# Altium PCB PCB_Final.PcbDoc
Units mil, origin at the board's own origin, x right, y up, seen from the top; angles counter-clockwise.
Board outline 700 x 825 mil, 2 copper layers (Top Layer, Bottom Layer); 49 components, 49 nets, 136 pads, 11 vias.
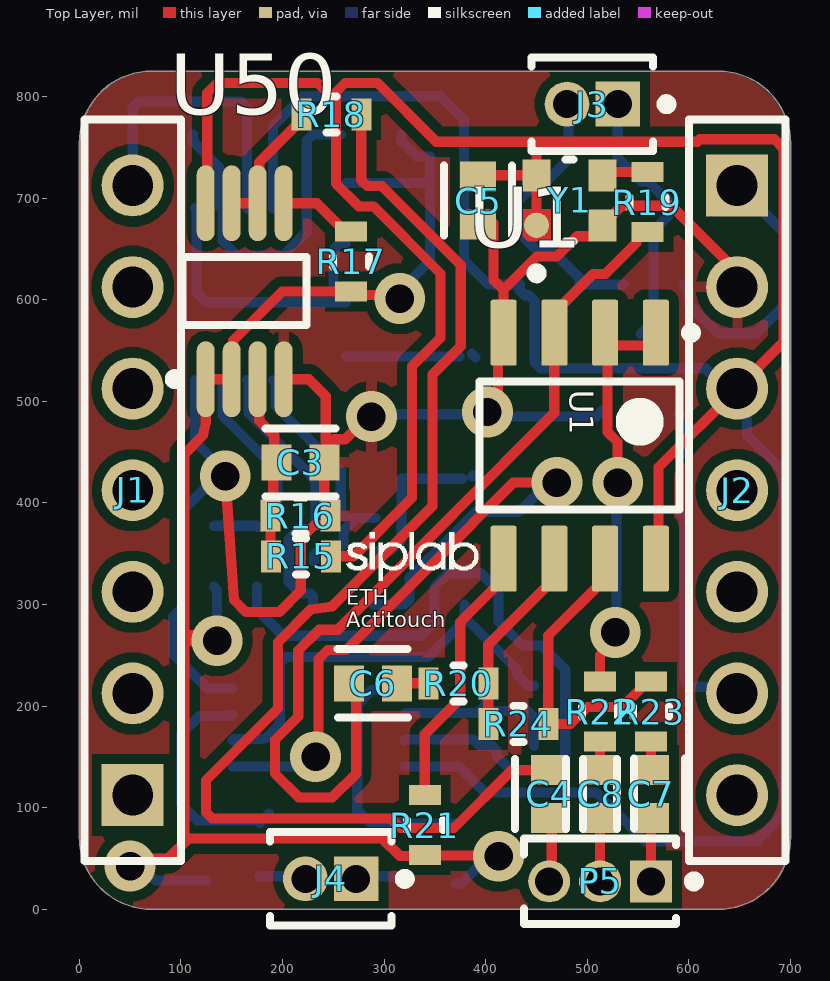
[diagram p0: Top Layer view]
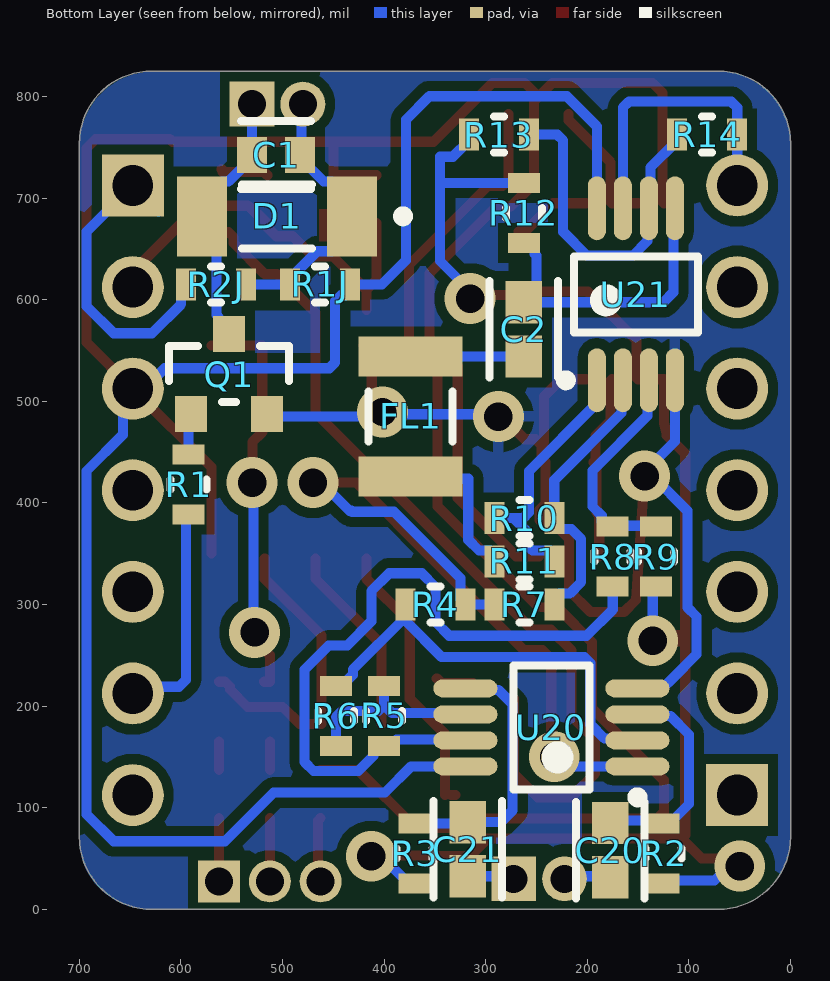
[diagram p1: Bottom Layer view, seen from below]
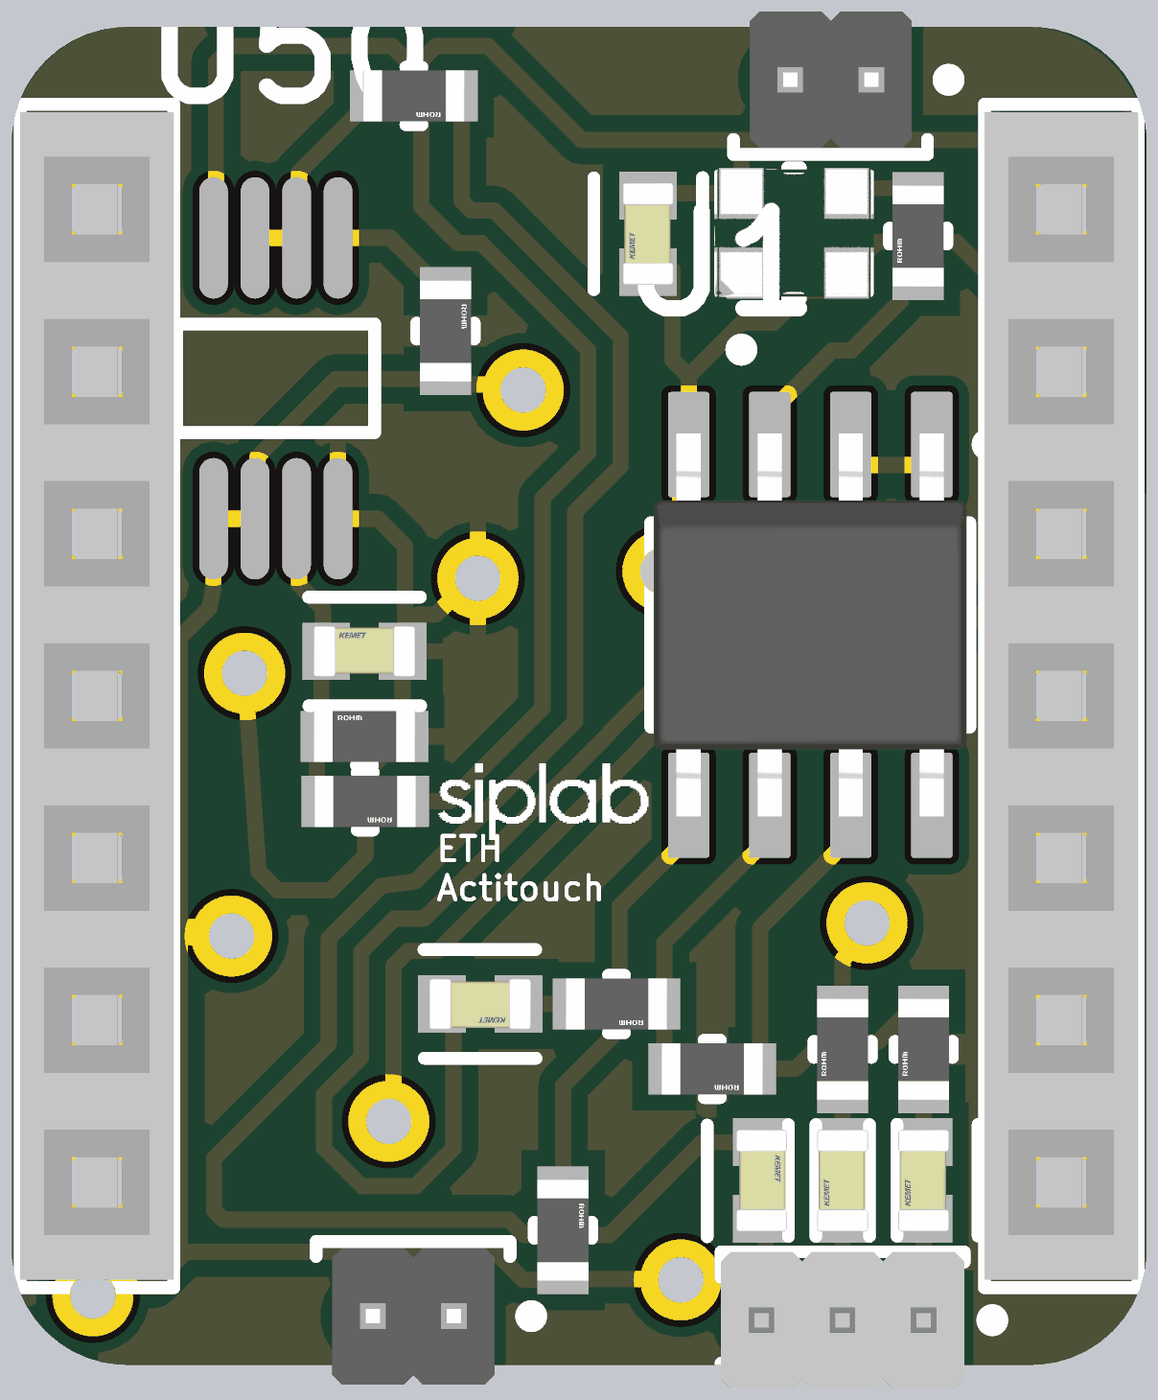
[diagram p2: 3D render of the assembled board from above, using the file's embedded part models]
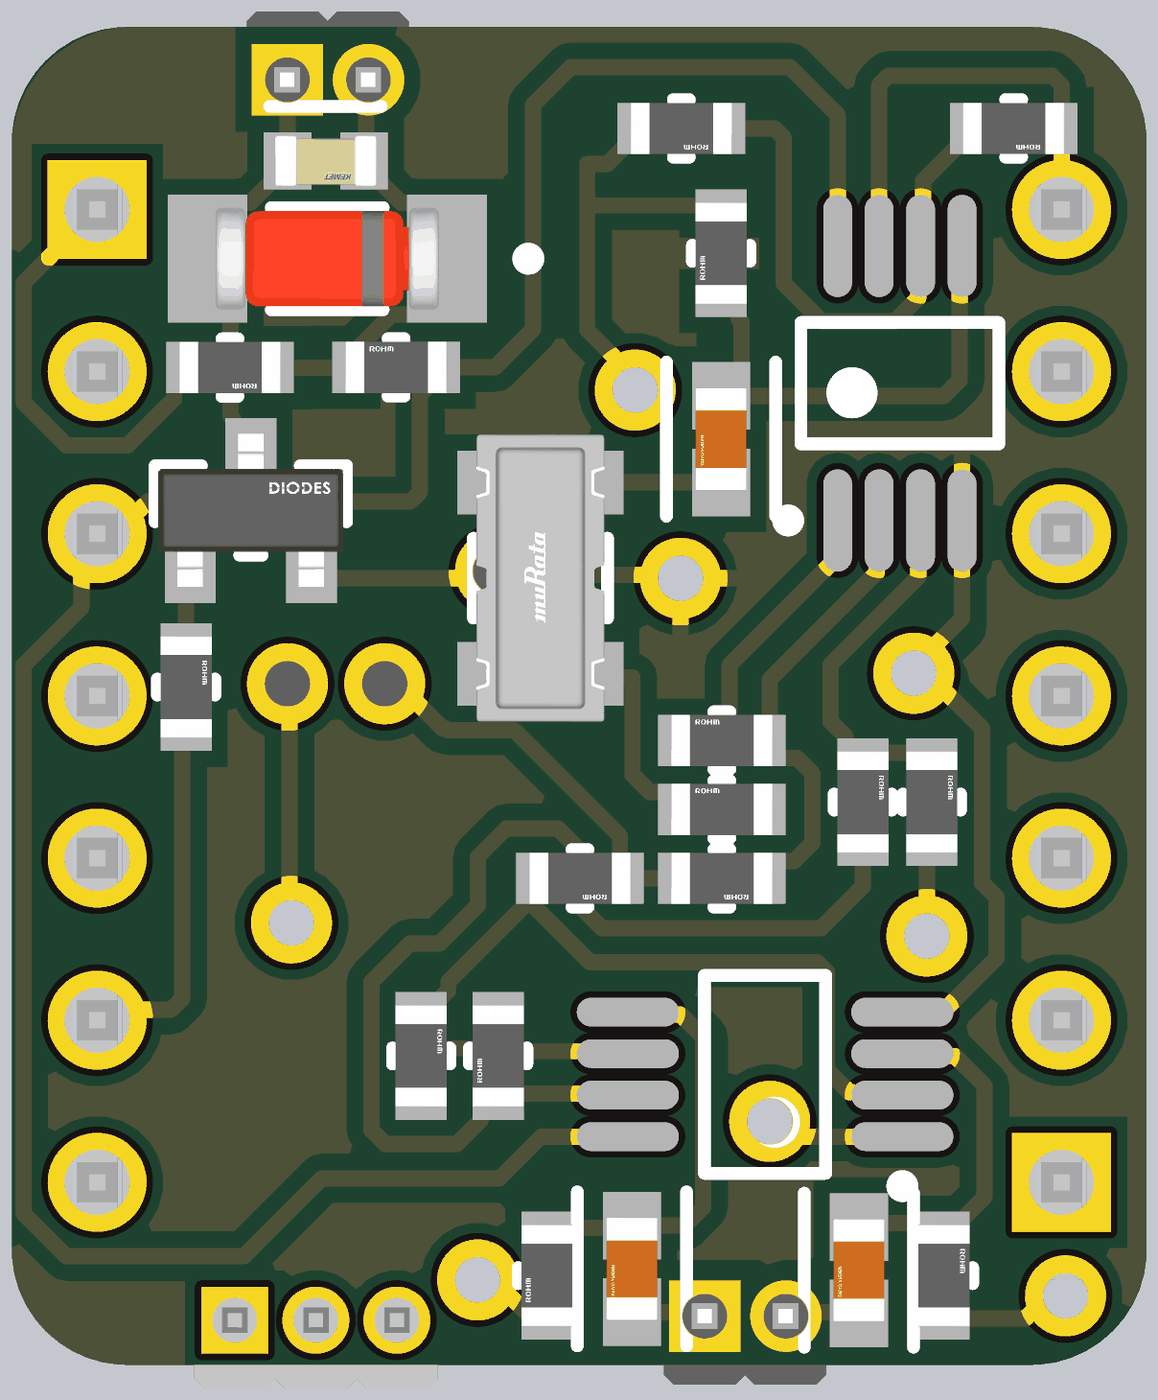
[diagram p3: 3D render of the assembled board from below, using the file's embedded part models]

## Layer stack, top to bottom
Top Solder: solder mask 0.4, Solder Resist, Dk 3.5
Top Layer: signal copper 1.4
Dielectric 1: dielectric 12.6, FR-4, Dk 4.8
Bottom Layer: signal copper 1.4
Bottom Solder: solder mask 0.4, Solder Resist, Dk 3.5

## Board outline
71.21,0 cw(c71.21,71.21) 0,71.21 0,753.79 cw(c71.21,753.79) 71.21,825 628.79,825 cw(c628.79,753.79) 700,753.79 700,71.21 cw(c628.79,71.21) 628.79,0

## Design rules (kind name [scope] priority, off if disabled: settings)
Clearance [All] p1: gap=10 ignorepadtopadclearanceinfootprint=FALSE except(0: Arc-Hole Track-Hole SMDPad-Hole THPad-Hole Via-Hole Fill-Hole Poly-Hole Region-Hole Text-Hole)
PolygonConnect [All] p1: connectstyle=Relief reliefconductorwidth=10 reliefentries=4 polygonreliefangle="90 Angle" airgapwidth=10
RoutingVias [All] p1: holewidth=28 width=50 viastyle="Through Hole" minholewidth=28 minwidth=50 maxholewidth=28 maxwidth=50
SolderMaskExpansion [All] p1: expansion=4 istentingtop=FALSE
Width [All] p1: maxlimit=10 minlimit=10 preferedwidth=10
30 further rules are at their usual default settings.

## Classes and differential pairs
component class U_VibrationMotor: C1 D1 Q1 R1 R1J R2J
component class U_ActiTouch_Transmitter_Sheet1: C5 C6 C7 C8 R19 R20 R21 R22 R23 R24 U1 Y1
component class U_ActiTouch_Shield_Sheet1: C3 C4 R15 R16 R17 R18 U50
component class U_ActiTouch_Receiver_Sheet1: C2 C20 C21 FL1 R2 R3 R4 R5 R6 R7 R8 R9 R10 R11 R12 R13 R14 U20 U21
component class ActiTouch: J1 J2 J3 J4 P5

## Components (designator, comment, footprint, x,y, rotation, side; value= is the part's Value field where it differs from the comment)
C1 "C0603C104K5RACTU" FP-C0603C-CF-MFG 506.38,742.5 r0 bottom value="0.10 μF"
C2 "EMK107B7104KAHT" FP-0603-L_1_6_0_1-W_0_8_0-IPC_B 262.5,570.84 r90 bottom
C3 "C0603C104K5RACTU" FP-C0603C-CF-MFG 217.5,440 r0 top value="0.10 μF"
C4 "C0603C104K5RACTU" FP-C0603C-CF-MFG 462.5,113.62 r270 top value="0.10 μF"
C5 "C0603C104K5RACTU" FP-C0603C-CF-MFG 392.5,697.5 r90 top value="0.10 μF"
C6 "C0603C104K5RACTU" FP-C0603C-CF-MFG 288.88,222.5 r180 top value="0.10 μF"
C7 "C0603C104K5RACTU" FP-C0603C-CF-MFG 562.5,113.62 r90 top value="0.10 μF"
C8 "C0603C104K5RACTU" FP-C0603C-CF-MFG 512.5,113.62 r90 top value="0.10 μF"
C20 "EMK107B7104KAHT" FP-0603-L_1_6_0_1-W_0_8_0-IPC_B 177.5,58.34 r90 bottom
C21 "EMK107B7104KAHT" FP-0603-L_1_6_0_1-W_0_8_0-IPC_B 317.5,59.16 r90 bottom
D1 "LS4448GS08" FP-6_560-5006_01-4-MFG 505.44,682.14 r0 bottom value=4pF
FL1 "CDSCB10M7GA121-R0" FP-CDSCB10M7GA121-R0-MFG 373.93,485.12 r90 bottom
J1 "SSQ-107-01-G-S" SMTC-SSQ-107-01-X-S 52.5,112.5 r90 top locked
J2 "SSQ-107-01-G-S" SMTC-SSQ-107-01-X-S 647.4,712.5 r270 top locked
J3 "GRPB021VWVN-RC" FP-GRPB021VWVN-RC-MFG 505,792.5 r180 top
J4 "GRPB021VWVN-RC" FP-GRPB021VWVN-RC-MFG 247.5,30 r180 top
P5 "GRPB031VWVN-RC" SLIN-GRPB031VWVN-RC_V 512.5,27.5 r180 top
Q1 "DMG2302UK-7" FP-SOT23-MFG 552.6,526.87 r90 bottom
R1 "ESR03EZPJ101" FP-ESR03-MFG 592.5,417.97 r270 bottom
R1J "ESR03EZPJ101" FP-ESR03-MFG 462.97,615.12 r180 bottom
R2 "ESR03EZPJ101" FP-ESR03-MFG 125,55 r270 bottom
R2J "ESR03EZPJ101" FP-ESR03-MFG 565.47,615 r0 bottom
R3 "ESR03EZPJ101" FP-ESR03-MFG 370,55 r90 bottom
R4 "ESR03EZPJ101" FP-ESR03-MFG 349.53,300 r0 bottom
R5 "ESR03EZPJ101" FP-ESR03-MFG 400,190.47 r90 bottom
R6 "ESR03EZPJ101" FP-ESR03-MFG 447.5,190.47 r270 bottom
R7 "ESR03EZPJ101" FP-ESR03-MFG 262.03,300 r0 bottom
R8 "ESR03EZPJ101" FP-ESR03-MFG 175,347.03 r270 bottom
R9 "ESR03EZPJ101" FP-ESR03-MFG 132.5,347.03 r270 bottom
R10 "ESR03EZPJ101" FP-ESR03-MFG 262.03,385 r180 bottom
R11 "ESR03EZPJ101" FP-ESR03-MFG 262.03,342.5 r180 bottom
R12 "ESR03EZPJ101" FP-ESR03-MFG 262.5,685.47 r90 bottom
R13 "ESR03EZPJ101" FP-ESR03-MFG 287.03,762.5 r0 bottom
R14 "ESR03EZPJ101" FP-ESR03-MFG 82.03,762.5 r0 bottom
R15 "ESR03EZPJ101" FP-ESR03-MFG 217.97,347.5 r180 top
R16 "ESR03EZPJ101" FP-ESR03-MFG 217.5,387.5 r0 top
R17 "ESR03EZPJ101" FP-ESR03-MFG 267.5,637.5 r270 top
R18 "ESR03EZPJ101" FP-ESR03-MFG 247.97,782.5 r180 top
R19 "ESR03EZPJ101" FP-ESR03-MFG 559.09,696.08 r90 top
R20 "ESR03EZPJ101" FP-ESR03-MFG 372.97,222.5 r180 top
R21 "ESR03EZPJ101" FP-ESR03-MFG 340,82.97 r270 top
R22 "ESR03EZPJ101" FP-ESR03-MFG 512.5,194.53 r90 top
R23 "ESR03EZPJ101" FP-ESR03-MFG 562.5,194.53 r90 top
R24 "ESR03EZPJ101" FP-ESR03-MFG 432.03,182.5 r180 top
U1 "OPA2836IDR" D0008A_M 492.5,456.28 r270 top
U20 "LTC6253IMS8#TRPBF" LT-MS8-8_N 235.35,179.11 r0 bottom
U21 "LTC6253IMS8#TRPBF" LT-MS8-8_N 152.2,605.35 r90 bottom
U50 "LTC6253IMS8#TRPBF" LT-MS8-8_M 162.8,608.39 r90 top
Y1 "DSC6003MI2A-010.7000T" FP-C04-1202-MFG 482.48,697.89 r0 top

## Footprints (in the part's own frame and the unit in brackets; to place one, negate y for a bottom-side part, rotate by r counter-clockwise, add the part's x,y. Pads: shape width x height; smd on the part's side, far side on the other; paste and mask are expansions set on the pad)
D0008A_M [mm] "SOIC, 8-Leads, Body 5x4mm, Pitch 1.27mm, IPC Low Density"
  rrect15% 1.65x0.65 smd: 1(-2.825,1.905) 2(-2.825,0.635) 3(-2.825,-0.635) 4(-2.825,-1.905) 5(2.825,-1.905) 6(2.825,-0.635) 7(2.825,0.635) 8(2.825,1.905)
  silkscreen extent -2.95,-2.5 1.6,2.91, body extent -3,-2.45 3,2.45, height 1.63
FP-6_560-5006_01-4-MFG [mm]
  rect 1.25x2 smd paste+0 mask+0: 1(-1.875,0) 2(1.875,0)
  silkscreen extent -3.27,-0.8 0.87,0.8, body extent -1.75,-0.8 1.75,0.8, height 1.6
FP-0603-L_1_6_0_1-W_0_8_0-IPC_B [mil]
  rect 41.64x35.91 smd paste+0 mask+0: 1(-26.66,0) 2(26.66,0)
  silkscreen extent -47,-34 47,34, body extent -31,-16 31,16, height 35
FP-C04-1202-MFG [mm]
  round 0.63 smd paste+0 mask+0: 1(-0.825,-0.625)
  rect 0.7x0.8 smd paste+0 mask+0: 2(0.825,-0.625) 3(0.825,0.625) 4(-0.825,0.625)
  Top Layer region: -1.175,-0.225 -0.475,-0.225 -0.475,-1.025 -1.045,-1.025 -1.175,-0.895
  silkscreen extent -0.95,-1.95 0.1,1.02, body extent -1.78,-1.53 1.78,1.53, height 0.25
FP-C0603C-CF-MFG [mm]
  rect 0.75x0.9 smd paste+0 mask+0: 1(-0.6,0) 2(0.6,0)
  silkscreen extent -0.87,-0.85 0.88,0.85, body extent -0.8,-0.4 0.8,0.4, height 0.87
FP-CDSCB10M7GA121-R0-MFG [mm]
  rect 1x2.6 smd paste+0 mask+0: 1(-1.5,0) 2(1.5,0)
  silkscreen extent -0.63,-1.05 0.63,1.05, body extent -2.25,-1 2.25,1, height 1
FP-ESR03-MFG [mm]
  rect 0.5x0.8 smd paste+0 mask+0: 1(-0.75,0) 2(0.75,0)
  silkscreen extent -0.13,-0.45 0.13,0.45, body extent -0.8,-0.4 0.8,0.4, height 0.55
FP-GRPB021VWVN-RC-MFG [mm]
  rect 1.12x1.12 hole 0.7 paste-1000 mask+0: 1(-0.635,0)
  round 1.12 hole 0.7 paste-1000 mask+0: 2(0.635,0)
  silkscreen extent -1.97,-1.17 1.52,1.17, body extent -1.62,-1.27 1.62,1.27, height 0.25
FP-SOT23-MFG [mm]
  rect 0.9x0.8 smd paste+0 mask+0: 1(-1,0.95) 2(-1,-0.95) 3(1,0)
  silkscreen extent -0.7,-1.5 0.7,1.5, body extent -1.2,-1.45 1.2,1.45, height 1.1
LT-MS8-8_M [mm] "SOP, 8-Leads, Body 3x3mm, Pitch 0.65mm, IPC Low Density"
  oval 1.9x0.45 smd: 1(-2.2,0.975) 2(-2.2,0.325) 3(-2.2,-0.325) 4(-2.2,-0.975) 5(2.2,-0.975) 6(2.2,-0.325) 7(2.2,0.325) 8(2.2,0.975)
  silkscreen extent -2.32,-1.55 0.85,1.87, body extent -1.55,-1.55 1.55,1.55, height 1.1
LT-MS8-8_N [mm] "SOP, 8-Leads, Body 3x3mm, Pitch 0.65mm, IPC Medium Density"
  oval 1.6x0.45 smd: 1(-2.15,0.975) 2(-2.15,0.325) 3(-2.15,-0.325) 4(-2.15,-0.975) 5(2.15,-0.975) 6(2.15,-0.325) 7(2.15,0.325) 8(2.15,0.975)
  silkscreen extent -2.27,-1.55 0.95,1.87, body extent -1.55,-1.55 1.55,1.55, height 1.1
SLIN-GRPB031VWVN-RC_V [mm] "Header, 3-Leads, Body 3.81x2.14mm, Pitch 1.27mm"
  rect 1.05x1.05 hole 0.7: 1(-1.27,0)
  round 1.05 hole 0.7: 2(0,0) 3(1.27,0)
  silkscreen extent -2.47,-1.07 1.91,1.07, body extent -1.9,-1.07 1.91,1.07, height 4
SMTC-SSQ-107-01-X-S [mm] "SQ Post Socket, 1x7 Pins, Vertical, 2.54mm Pitch, Female"
  rect 1.55x1.55 hole 1.02: 1(0,0)
  round 1.55 hole 1.02: 2(2.54,0) 3(5.08,0) 4(7.62,0) 5(10.16,0) 6(12.7,0) 7(15.24,0)
  silkscreen extent -1.65,-1.2 16.89,1.2, body extent -1.52,-1.21 16.76,1.21, height 8.51

## Part data
C1 C3 C4 C5 C6 C7 C8: library part CMP-2006-03061-2, "CAP CER 0.1UF 50V X7R 0603", Capacitance="0.10 μF", Manufacturer=KEMET, Package=C0603C-CF, Temperature="-55°C to +125°C", Temperature Characteristic=X7R, Temperature Coefficient=30ppm/°C, Temperature Range High=+125°C, Temperature Range Low=-55°C, Tolerance=0.1, Voltage Rating="50 V", Automotive=Yes, Automotive Grade="Grade 1", Category=Cap, ComponentLink2Description=Datasheet, ComponentLink2URL=https://api.kemet.com/component-edge/download/datasheet/C0603C100J5GACAUTO.pdf, Device Class L1="Passive Components", Device Class L2=Capacitors, Device Class L3="Ceramic Capacitors", Digikey Description="CAP CER 0.1UF 50V X7R 0603", Height=0.87mm, Lead Free=Yes, Manufacturer Part Number=C0603C104K5RACTU, Material=Ceramic, Octopart=https://octopart.com/c0603c104k5ractu-kemet-139244, RoHS=TRUE
C2 C20 C21: library part CMP-14477-003798-2, "None", Capacitance=100nF, Case/Package=0603, Package Quantity=4000, Tolerance=10%, Voltage Rating=16V, Halogen Free="Halogen Free", Lead Free="Lead Free", Packaging="Tape and Reel", Voltage Rating (DC)=16V
D1: library part CMP-02540-000047-1, "DIODE GEN PURP 100V 300MA SOD80", Capacitance=4pF, Forward Current=300mA, Manufacturer=Vishay, Max Junction Temp=+175°C, Max Repetitive Reverse Voltage=100V, Max Surge Forward Current=2A, Package=6.560-5006.01-4, Peak Reverse Current=5uA, Reverse Voltage=75V, Temperature="to +175°C", Automotive=Yes, Automotive Grade="Grade 0", Category=Diode, ComponentLink2Description=Datasheet, ComponentLink2URL=http://www.vishay.com/docs/85561/ls4148.pdf, Device Class L1="Discrete Semiconductors", Device Class L2=Diodes, Device Class L3="Rectifier Diodes", Digikey Description="DIODE GEN PURP 100V 300MA SOD80", Height=1.6mm, Lead Free=Yes, Manufacturer Part Number=LS4448GS08, Mouser Description="Diodes - General Purpose, Power, Switching 100V Io/150mA 2.0 Amp IFSM", Octopart=https://octopart.com/ls4448gs08-vishay-55433966, RoHS=TRUE, Temperature Range High=+175°C
FL1: library part CMP-06047-000004-1, "Ceramic Filter 10.7MHz 2-Pin Surface Mount Emboss T/R"
J1 J2: library part CMP-1023-00284-1, "SQ Post Socket, Through-hole, Vertical, -55 to 125 degC, 2.54 mm Pitch, 7-Pin, Female, RoHS", Manufacturer=Samtec, Temperature Range="-55 to 125 degC", ComponentLink1Description="Manufacturer URL", ComponentLink1URL=http://www.samtec.com, ComponentLink2Description=Datasheet, ComponentLink2URL=http://www.samtec.com/documents/webfiles/pdf/SSQ_TH.PDF, ComponentLink3Description="Package Specification", ComponentLink3URL=http://www.samtec.com/documents/webfiles/cpdf/SSQ-1XX-XX-XXX-X-XX-XXX-XX-X-MKT.pdf, DatasheetVersion=F-214, Mounting Technology=Through-hole, Orientation=Vertical, PackageDescription="Assembly, Socket Strip .025[0.64] SQ Tail", PackageReference=SSQ-107-01-X-S, PackageVersion="BD, 6/1987", PartNumber=SSQ-107-01-G-S, Pitch="2.54 mm", RoHS=True
J3 J4: library part CMP-2000-06371-2, "CONN HEADER VERT 2POS 1.27MM", Package Quantity=1, Connector Type="Male Pin", Contact Mating Length=0.118inch, Contact Plating=Gold, Contact Type="Male Pin", Lead Free="Lead Free", Mount="Through Hole", Number of Positions=2, Number of Rows=1, Packaging=Bulk, Pitch=0.05inch, RoHS Compliant=Yes, Termination=Solder
P5: library part CMP-2000-06372-1, "Male Header, Pitch 1.27 mm, 1 x 3 Position, Height 4 mm, Tail Length 2.3 mm, -40 to 105 degC, RoHS, Bulk", Manufacturer=Sullins, Package Description="Male Header, Pitch 1.27 mm, 1 x 3 Position, Height 4 mm, Tail Length 2.3 mm", Standard Package=1, Catalog Drawings=S9014ESeriesTop, Category=Connectors,Interconnects, Connector Type=Header,Unshrouded, Contact Finish=Gold, Contact Finish Thickness=Flash, Contact Mating Length="0.118\"(3.00mm)", Contact Type=MalePin, Datasheet URL=http://www.sullinscorp.com/drawings/71_GRPB___1VWVN-RC,_10957-C.pdf, Datasheet Version="Rev. C, 12/2008", Dynamic Catalog=GRPB, Family=RectangularConnectors-Headers,MalePins, Manufacturer URL=http://www.sullinscorp.com/, Mating Products="S9010E-03-ND / -CONNHEADER.050\"3POSR/APCB / S9008E-03-ND / -CONNHEADER.050\"3POSPCBGOLD / S9005E-03-ND / -CONNHEADER.050\"3POSSMDGOLD", Mounting Technology=ThroughHole, Mounting Type=ThroughHole, Number of Positions=3, Number of Positions Loaded=All, Number of Rows=1, Other Names=S9014E-03, Package Reference=GRPB031VWVN-RC, Packaging=Bulk, Pitch="0.050\"(1.27mm)", Termination=Solder
Q1: library part CMP-12801-000001-1, "MOSFET N-CH 20V 2.8A SOT23", Continuous Drain Current=2.8A, Drain To Source Breakdown Voltage=20V, Drain To Source Resistance=61mΩ, Gate To Source Voltage=12V, Input Capacitace At Vds="130pF @ 10V", Manufacturer="Diodes Inc.", Max Forward Diode Voltage=1.2V, Max Junction Temp=+150°C, Package=SOT23, Power Dissipation=0.66W, Pulse Drain Current=12A, Temperature="-55°C to +150°C", Temperature Range Low=-55°C, Typ Forward Diode Voltage=0.7V, Automotive=Yes, Automotive Grade="Grade 0", Category=Trans, ComponentLink2Description=Datasheet, ComponentLink2URL=https://www.diodes.com/assets/Datasheets/DMG2302UK.pdf, Depletion Mode=False, Device Class L1="Discrete Semiconductors", Device Class L2=Transistors, Device Class L3=MOSFETs, Digikey Description="MOSFET N-CH 20V 2.8A SOT23", Drain To Source Voltage=20V, Footprint Url=https://www.diodes.com/assets/Package-Files/SOT23.pdf, Gate Charge At Vgs="2.8nC @ 10V", Height=1.1mm, Lead Free=Yes, Manufacturer Part Number=DMG2302UK-7, Number Of Channels=1, Number Of N Channels=1, Octopart=https://octopart.com/dmg2302uk-7-diodes+inc.-73850182, Reverse Recovery Charge=0.5nC, Reverse Recovery Time=5.3ns, RoHS=TRUE, Rthja Max=192°C/W, Standoff Height=0.013mm, Temperature Range High=+150°C, Threshold Vgs Max=1V, Threshold Vgs Min=0.3V, Turn Off Delay Time=4.2ns, Turn On Delay Time=0.6ns
R1 R2 R3 R20 R21 R24: library part CMP-08839-000028-1, "100Ω ±5% 0.25W 0603 Anti-Surge Chip Resistor AEC-Q200", Case Code (Imperial)=0603, Case Code (Metric)=1608, Max Operating Temperature=155°C, Max Power Dissipation=250mW, Min Operating Temperature=-55°C, Power Rating=200mW, Resistance=10kR, Temperature Coefficient=200ppm/°C, Tolerance=5%, Case/Package=0603, Features="Automotive AEC-Q200", Lead Free="Lead Free", Number of Terminations=2, Packaging="Tape and Reel", RoHS Compliant=Yes, Series=ESR, Size Code=0603
R1J R2J: library part CMP-08839-000028-1, "100Ω ±5% 0.25W 0603 Anti-Surge Chip Resistor AEC-Q200", Case Code (Imperial)=0603, Case Code (Metric)=1608, Max Operating Temperature=155°C, Max Power Dissipation=250mW, Min Operating Temperature=-55°C, Power Rating=200mW, Resistance=100R, Temperature Coefficient=200ppm/°C, Tolerance=5%, Case/Package=0603, Features="Automotive AEC-Q200", Lead Free="Lead Free", Number of Terminations=2, Packaging="Tape and Reel", RoHS Compliant=Yes, Series=ESR, Size Code=0603
R4 R5 R9 R10 R13 R14: library part CMP-08839-000028-1, "100Ω ±5% 0.25W 0603 Anti-Surge Chip Resistor AEC-Q200", Case Code (Imperial)=0603, Case Code (Metric)=1608, Max Operating Temperature=155°C, Max Power Dissipation=250mW, Min Operating Temperature=-55°C, Power Rating=200mW, Resistance=1kR, Temperature Coefficient=200ppm/°C, Tolerance=5%, Case/Package=0603, Features="Automotive AEC-Q200", Lead Free="Lead Free", Number of Terminations=2, Packaging="Tape and Reel", RoHS Compliant=Yes, Series=ESR, Size Code=0603
R6: library part CMP-08839-000028-1, "100Ω ±5% 0.25W 0603 Anti-Surge Chip Resistor AEC-Q200", Case Code (Imperial)=0603, Case Code (Metric)=1608, Max Operating Temperature=155°C, Max Power Dissipation=250mW, Min Operating Temperature=-55°C, Power Rating=200mW, Resistance=402R, Temperature Coefficient=200ppm/°C, Tolerance=5%, Case/Package=0603, Features="Automotive AEC-Q200", Lead Free="Lead Free", Number of Terminations=2, Packaging="Tape and Reel", RoHS Compliant=Yes, Series=ESR, Size Code=0603
R7 R8: library part CMP-08839-000028-1, "100Ω ±5% 0.25W 0603 Anti-Surge Chip Resistor AEC-Q200", Case Code (Imperial)=0603, Case Code (Metric)=1608, Max Operating Temperature=155°C, Max Power Dissipation=250mW, Min Operating Temperature=-55°C, Power Rating=200mW, Resistance=200R, Temperature Coefficient=200ppm/°C, Tolerance=5%, Case/Package=0603, Features="Automotive AEC-Q200", Lead Free="Lead Free", Number of Terminations=2, Packaging="Tape and Reel", RoHS Compliant=Yes, Series=ESR, Size Code=0603
R11 R12: library part CMP-08839-000028-1, "100Ω ±5% 0.25W 0603 Anti-Surge Chip Resistor AEC-Q200", Case Code (Imperial)=0603, Case Code (Metric)=1608, Max Operating Temperature=155°C, Max Power Dissipation=250mW, Min Operating Temperature=-55°C, Power Rating=200mW, Resistance=330R, Temperature Coefficient=200ppm/°C, Tolerance=5%, Case/Package=0603, Features="Automotive AEC-Q200", Lead Free="Lead Free", Number of Terminations=2, Packaging="Tape and Reel", RoHS Compliant=Yes, Series=ESR, Size Code=0603
R15 R16: library part CMP-08839-000028-1, "100Ω ±5% 0.25W 0603 Anti-Surge Chip Resistor AEC-Q200", Case Code (Imperial)=0603, Case Code (Metric)=1608, Max Operating Temperature=155°C, Max Power Dissipation=250mW, Min Operating Temperature=-55°C, Power Rating=200mW, Resistance=100kR, Temperature Coefficient=200ppm/°C, Tolerance=5%, Case/Package=0603, Features="Automotive AEC-Q200", Lead Free="Lead Free", Number of Terminations=2, Packaging="Tape and Reel", RoHS Compliant=Yes, Series=ESR, Size Code=0603
R17 R18 R19 R22 R23: library part CMP-08839-000028-1, "100Ω ±5% 0.25W 0603 Anti-Surge Chip Resistor AEC-Q200", Case Code (Imperial)=0603, Case Code (Metric)=1608, Max Operating Temperature=155°C, Max Power Dissipation=250mW, Min Operating Temperature=-55°C, Power Rating=200mW, Resistance=10R, Temperature Coefficient=200ppm/°C, Tolerance=5%, Case/Package=0603, Features="Automotive AEC-Q200", Lead Free="Lead Free", Number of Terminations=2, Packaging="Tape and Reel", RoHS Compliant=Yes, Series=ESR, Size Code=0603
U1: library part CMP-0018-00293-2, "Dual, Very Low Power, Rail to Rail Out, Negative Rail In, VFB Operational Amplifier, 2.5 to 5.5 V, -40 to 85 degC, 8-pin SOIC (D8), Green (RoHS & no Sb/Br)", Manufacturer="Texas Instruments", 2nd Harmonic(dBc)=85, 3rd Harmonic(dBc)=105, Acl, min stable gain(V/V)=1, BW @ Acl(MHz)=205, Code_JEDEC=MS-012, ComponentLink1Description="Manufacturer URL", ComponentLink1URL=http://www.ti.com/, ComponentLink2Description=Datasheet, ComponentLink2URL=http://www.ti.com/general/docs/lit/getliterature.tsp?genericPartNumber=OPA2836&fileType=pdf, ComponentLink3Description="Package Specification", ComponentLink3URL=http://www.ti.com/litv/pdf/msoi002j, DatasheetVersion=SLOS712D, Eco-Plan="Green (RoHS & no Sb/Br)", Iib(Max)(nA)=1000, Io(Typ)(mA)=50, Iq per channel(Max)(mA)=1, Mounting Technology="Surface Mount", Number Of Channels=2, PackageDescription="8-Pin Plastic Small Outline, Body 4.9 x 3.9 mm, Pitch 1.27 mm", PackageReference=D0008A, PackageVersion="4040047-3/M, 06/2011", PartNumber=OPA2836IDR, Settling Time (0.1%)(Typ)(ns)=30, Slew Rate(Typ)(V/us)=560, Sub Family="High Output Current Amplifier (>=50mA), High Speed Amplifier (>=50MHz), Low Noise Amp (<=10nV/rtHz), Low Offset Voltage Amplifier (<=500uV), Low Supply Voltage Amplifier (<=2.7V)", Vio(Max)(mV)=0.4, Vn at Flatband(Typ)(nV/rtHz)=4.6, Vs(Max)(V)=5.5, Vs(Min)(V)=2.5
U20 U21 U50: library part CMP-0359-00902-2, "Dual Channel, Power Efficient Operational Amplifier, RRIO, 720 MHz Typical GBW, 280 V/us Typical SR, 2.5 to 5.25 V, 8-Pin SOP (MS8-8), Industrial, Pb-Free, Reel", Linear Technology Part Number=LTC6253, Manufacturer="Linear Technology", Channels (#)=2, ComponentLink1Description="Manufacturer URL", ComponentLink1URL=http://www.linear.com/, ComponentLink2Description=Datasheet, ComponentLink2URL=http://cds.linear.com/docs/en/datasheet/625234fc.pdf, ComponentLink3Description="Package Specification", ComponentLink3URL=http://cds.linear.com/docs/en/packaging/05081610_G_SO8.pdf, DatasheetVersion="Rev. C", GBW (MHz) Typical=720, Is (mA) Typical=3.3, Mounting Technology="Surface Mount", PackageDescription="8-Lead Plastic Small Outline, Body 3.9 x 4.9 mm, Pitch 1.27 mm", PackageReference=LT-MS8-8, PackageVersion="Rev G", Packing=Reel, PartNumber=LTC6253IMS8#TRPBF, RevisionNote="URLs updated", RoHS=Pb-Free, SR (V/us) Typical=280, Type=VFB, Vos (mV) Typical=0.05, Vs Max (V)=5.25, Vs Min (V)=2.5
Y1: library part CMP-06255-000006-1, Case/Package=SMD/SMT, Frequency=24MHz, Frequency Stability=50ppm, Max Operating Temperature=85°C, Max Supply Current=1.3mA, Min Operating Temperature=-40°C, Ratings=AEC-Q100, Mount="Surface Mount", Packaging="Tape and Reel"

## Via types
v1: diameter 50, hole 28, Top Layer to Bottom Layer, 11 vias

## Nets (pads, with @x,y where several pads share a name; then routed paths per layer and width w, separated by ;. In a path a pad name is that pad's centre, name@x,y a point inside that pad or via, vN(x,y) a via of type N, cw(c..) or ccw(c..) an arc to the next point about the centre after c; other vN are vias at no path point)
1V65: R2.2 R3.1 R9.2 R12.2 R13.2 R17.2 R21.2 U50.1 U50.2 | length 1636.4
  Top Layer w10: v1(50,42.5) 57.65,50.15 87.65,50.15 107.05,69.55 ; v1(315.46,601.1) 312.02,604.53 270.94,604.53 R17.2 199.51,607.97 151.48,559.94 151.48,523.25 U50.2 U50.1 124.41,478.9 121.77,466.6 103.6,448.43 103.6,270 ; R21.2@350.47,48.88 R21.2@350.47,52.6 ; v1(412.67,52.32) 412.11,52.88 350.75,52.88 R21.2@350.47,52.6 ; 103.6,270 106.69,266.91 110.44,263.49 114.54,263.49 114.77,263.5 129.61,264.16 v1(135.57,264.43) 132.5,261.36 129.73,261.36 129.73,268.04 119.59,270 103.6,270 ; 103.6,270 103.6,72.99 107.05,69.55 ; 107.05,69.55 298.26,69.55 315.2,52.6 R21.2@350.47,52.6
  Bottom Layer w10: v1(50,42.5) 60.82,42.5 74.88,28.44 R2.2@125,28.44 ; R9.2 135.57,314.43 v1(135.57,264.43) ; R12.2 345,715 ; v1(315.46,601.1) 315.46,608.57 345,638.12 345,715 ; R13.2 316.56,756.59 332.5,740.65 345,740.65 345,715 ; R3.1 375.91,25.47 402.75,52.32 v1(412.67,52.32)
3V3: C5.2 J2.3 R1J.2 R15.1 U1.8 U20.8 U21.8 U50.8 Y1.1 Y1.4 | length 3501.1
  Top Layer w10: U50.8 125.89,696.48 125.89,803.39 135.75,813.25 234.5,813.25 252.66,795.09 ; R15.1 270,347.5 327.5,405 327.5,534.5 355.46,562.46 355.46,625.88 289.46,691.87 275.07,691.87 252.66,714.29 252.66,795.09 ; C5.2@407.5,722.5 Y1.4 ; Y1.1 Y1.4 ; U1.8@570,350.27 570,435.1 J2.3 692.91,558.01 692.91,749.23 684.13,758.01 610.68,758.01 608.12,755.45 450,755.45 ; 252.66,795.09 252.66,804.46 261.44,813.25 293.56,813.25 351.35,755.45 450,755.45 ; Y1.4 450,755.45
  Bottom Layer w10: U21.8 190.59,770.59 220.22,800.22 355.48,800.22 378.51,777.19 378.51,638.78 402.17,615.12 R1J.2 433.44,609.21 438.29,604.37 442.38,604.37 448.24,598.51 448.24,538.36 454.1,532.5 616.03,532.5 636.03,512.5 J2.3 657.16,502.74 657.16,467.1 692.91,431.35 692.91,93.65 666.25,66.99 556.7,66.99 508.69,115 399.14,115 373.41,140.73 U20.8
5V: J2.1 R2J.2 | length 311.1
  Bottom Layer w10: R2J.2 599.84,610.16 599.84,595.7 628.55,566.99 666.25,566.99 692.91,593.65 692.91,666.99 J2.1 J2.1@621.89,686.99
GND: C3.2 C5.1 J2.2 Q1.2 R16.2 U1.4 U20.4 U21.4 U50.4 Y1.2 | length 1583.3
  Top Layer w10: v1(143.6,426.47) 152.14,304.43 164.07,292.5 196.71,292.5 217.97,313.76 217.97,364.78 231.44,378.25 242.19,378.25 247.03,383.09 247.03,393.41 241.12,399.31 C3.2 245,443.88 C3.2@245,456.83 ; U50.4 225.73,521.77 242.5,505 242.5,460 245,457.5 C3.2@245,456.83 ; v1(287.5,485) 283.93,485 261.64,462.72 250.89,462.72 C3.2@245,456.83 ; C5.1@407.5,675.26 407.5,619.68 417.5,609.68 ; v1@412.2,510.89 412.2,547.15 U1.4@420,554.94 ; U1.4@417.5,590 417.5,609.68 ; J2.2@641.52,606.62 J2.2 637.64,622.26 637.64,637.36 582.5,692.5 533.9,692.5 525.43,684.04 523.74,684.04 514.96,675.26 Y1.2 514.96,671.32 506.18,662.54 489.99,662.54 469.99,642.54 450.35,642.54 417.5,609.68
  Bottom Layer w10: U21.4 113.82,460.47 v1@145.68,428.61 ; v1(143.6,426.47) 135.61,426.47 101.52,392.38 101.52,297.16 92.5,288.14 92.5,250.93 115.93,227.5 115.98,227.5 125.98,217.5 U20.4 ; v1(287.5,485) 289.75,487.25 399.38,487.25 v1(401.63,489.49) ; v1@401.63,485 508.72,485 Q1.2@515.1,491.38
NetC1_1: C1.1 D1.1 J3.2 R1J.1 R2J.1 | length 282.1
  Bottom Layer w10: J3.2 481.38,791.12 481.38,743.88 C1.1 482.76,739.55 459.72,716.51 451.23,716.51 431.62,696.9 D1.1 431.62,667.37 451.23,647.77 465.76,647.77 492.5,621.02 R1J.1 492.62,615 R2J.1 ; J3.2@492.5,792.62 J3.2@492.63,792.49
NetC1_2: C1.2 D1.2 J3.1 Q1.3 | length 261.6
  Bottom Layer w10: J3.1 C1.2 530,739.55 553.04,716.51 559.66,716.51 579.26,696.9 D1.2 565,667.87 565,584.81 563.35,583.16 563.35,576.99 Q1.3
NetC2_1: C2.1 FL1.2 | length 116.5
  Bottom Layer w10: C2.1 FL1.2 ; FL1.2@386.43,546.8 FL1.2@390,543.23
NetC2_2: C2.2 R12.1 U21.5 | length 306.9
  Bottom Layer w10: U21.5 115.3,688.52 115.3,607.2 125,597.5 C2.2 250,610 250,643.44 251.75,645.2 251.75,651.1 256.59,655.94 R12.1
NetC3_1: C3.1 R15.2 R16.1 U50.3 | length 184.5
  Top Layer w10: U50.3 177.07,520.3 177.07,481.14 191.85,466.36 191.85,442.03 C3.1 190.93,437.05 190.93,390.45 R16.1 188.21,387.26 188.21,347.74 R15.2
NetC4_1: C4.1 R18.1 | length 1217.6
  Top Layer w10: R18.1 277.5,717.73 283.36,711.87 297.75,711.87 375.46,634.16 375.46,554.18 347.5,526.22 347.5,396.72 248.93,298.15 227.71,295.22 195.49,263 195.49,197.99 124.68,127.18 124.68,95.41 130.54,89.55 306.54,89.55 316.09,80 368.69,80 425.94,137.24 C4.1
NetC4_2: C4.2 P5.3 | length 48.5
  Top Layer w10: C4.2 465,87.5 P5.3@465,42.5
NetC6_1: C6.1 R20.2 | length 37.8
  Top Layer w10: C6.1 R20.2 R20.2@348.29,227.34
NetC6_2: C6.2 R19.1 U1.3 | length 882.8
  Top Layer w10: C6.2@272.5,207.5 272.5,133.58 249.07,110.15 215.93,110.15 192.5,133.58 192.5,166.72 215.49,189.71 215.49,254.71 235.99,275.22 254.29,275.22 367.5,388.43 368.75,389.96 467.5,488.71 U1.3@467.5,565 ; U1.3 467.5,587.18 505.77,625.46 517.87,625.46 548.35,655.93 548.35,661.71 553.19,666.56 R19.1 ; R19.1@563.19,663.11 R19.1@569.09,663.11
NetC7_1: C7.1 P5.1 | length 60
  Top Layer w10: P5.1@562.5,30 C7.1
NetC7_2: C7.2 R23.1 | length 27.8
  Top Layer w10: C7.2 R23.1
NetC8_1: C8.1 P5.2 | length 62.5
  Top Layer w10: P5.2 C8.1
NetC8_2: C8.2 R22.1 | length 27.8
  Top Layer w10: C8.2 R22.1
NetC20_1: C20.1 J4.2 | length 42.8
  Bottom Layer w10: C20.1 178.32,32.5 J4.2@220,32.5
NetC20_2: C20.2 R2.1 U20.3 | length 225.5
  Bottom Layer w10: U20.3 149.23,190.43 118.44,190.43 100,171.99 100,103.62 116.12,87.5 175,87.5 C20.2 C20.2@186.68,94.18
NetC21_1: C21.1 J4.1 | length 47.5
  Bottom Layer w10: J4.1@270,32.5 C21.1
NetC21_2: C21.2 R3.2 U20.5 | length 259.2
  Bottom Layer w10: U20.5 318.52,216.02 287.74,216.02 273.5,201.79 273.5,97.4 285.08,85.82 C21.2 318.79,84.53 R3.2
NetFL1_1: FL1.1 R11.1 | length 160
  Bottom Layer w10: R11.1@290,342.5 290,348.41 294.84,353.25 306.61,353.25 317.18,363.82 317.18,423.82 FL1.1@376.93,423.82 ; FL1.1@386.93,426.32 FL1.1@387.5,426.89
NetQ1_1: Q1.1 R1.1 | length 41
  Bottom Layer w10: Q1.1 592.5,485 R1.1
NetR4_1: R4.1 R7.2 U20.1 | length 732.8
  Top Layer w10: v1(232.5,150.15) 235.49,153.14 235.49,246.43 244.28,255.22 262.57,255.22 387.5,380.15 387.5,380.42 427.08,420 v1(470,420)
  Bottom Layer w10: U20.1 212.26,140.73 221.68,150.15 v1(232.5,150.15) ; R7.2@289.06,300 R4.1 324.84,304.84 324.84,325.89 369.7,370.75 390.34,391.38 431.33,391.38 432.27,392.33 434.03,392.33 461.71,420 v1(470,420)
NetR4_2: R4.2 R6.1 U20.2 | length 428
  Bottom Layer w10: U20.2 152.19,167.8 180.28,167.8 180.54,168.05 183.23,168.05 197.2,182.03 197.2,242.37 203.06,248.23 343.32,248.23 379.06,283.97 R4.2@379.06,287.75 ; R4.2 379.06,297.05 379.06,294.09 R4.2@379.06,287.75 ; R6.1 441.59,220 430.75,230.85 430.75,236.06 R4.2@379.06,287.75
NetR5_1: R5.1 R8.2 U20.7 | length 708.2
  Bottom Layer w10: R8.2 175,295 200.75,269.25 336.06,269.25 349.53,282.72 349.53,317.28 363,330.75 395.11,330.75 412.55,313.31 412.55,283.38 436.21,259.72 454.59,259.72 478.25,236.06 478.25,144.89 469.46,136.1 425.54,136.1 410.75,150.89 410.75,156.1 405.91,160.94 R5.1 394.09,160.94 387.89,167.15 320.83,167.15 U20.7
NetR5_2: R5.2 R6.2 U20.6 | length 183.5
  Bottom Layer w10: U20.6 321.48,193.39 392.37,193.39 400,201.02 ; R5.2 400,201.02 ; R6.2 447.5,189.3 441.64,195.16 405.86,195.16 400,201.02
NetR7_1: R7.1 R10.2 U21.2 | length 282.4
  Bottom Layer w10: U21.2 166.48,519.23 166.48,488.44 232.5,422.42 R10.2 232.5,379.09 227.66,374.25 215.89,374.25 206.1,364.46 206.1,322.09 217.45,310.75 227.66,310.75 230,308.41 R7.1@230,300
NetR8_1: R8.1 R9.1 U21.3 | length 220.3
  Bottom Layer w10: R9.1@132.5,377.5 175,377.5 R8.1 180.91,376.56 185.75,381.4 185.75,387.3 195,396.56 195,431.64 140.89,485.75 U21.3@140.89,519.23
NetR10_1: R10.1 R11.2 U21.1 | length 264.5
  Bottom Layer w10: U21.1 193.11,518.19 193.11,495.55 257.34,431.32 257.34,390.86 263.2,385 272.34,385 ; R11.2@230.94,342.5 230.94,348.41 235.79,353.25 254.09,353.25 259.95,359.11 259.95,372.6 272.34,385 ; R10.1 272.34,385
NetR13_1: R13.1 R14.2 U21.6 | length 341.3
  Bottom Layer w10: R14.2 111.56,756.59 137.93,730.22 137.93,691.48 U21.6 140.89,688.52 140.89,657.74 155.12,643.5 200.47,643.5 223.82,666.85 223.82,756.64 229.68,762.5 R13.1
NetR17_1: R17.1 U50.5 | length 77.9
  Top Layer w10: U50.5 233.62,695 261.59,667.03 R17.1
NetR18_2: R18.2 U50.6 U50.7 | length 130.8
  Top Layer w10: U50.7 U50.6 177.07,696.48 177.07,735.22 218.44,776.59 R18.2
NetR19_2: R19.2 Y1.3 | length 48.3
  Top Layer w10: Y1.3 518.07,725.61 R19.2 cw(c569.04,724.61) R19.2@559.79,728.39
NetR20_1: R20.1 R24.2 U1.6 | length 189.5
  Top Layer w10: R24.2 R20.1 402.5,260.37 467.5,325.37 U1.6
NetR21_1: R21.1 U1.5 | length 268.8
  Top Layer w10: R21.1@330,112.5 R21.1@334.09,112.5 ; R21.1 340,172.25 374.85,207.1 374.85,282.73 417.5,325.37 U1.5
NetR22_2: R22.2 U1.1 U1.2 | length 380.1
  Top Layer w10: R22.2@518.41,224.06 R22.2 512.5,250 v1@520,257.5 ; v1(530,420) 529.7,420.3 529.7,460 520,469.7 520,554.94 U1.1@570,554.94
  Bottom Layer w10: v1(527.5,272.5) 528.75,273.75 528.75,418.75 v1(530,420)
NetR23_2: R23.2 R24.1 U1.7 | length 305.5
  Top Layer w10: U1.7 517.5,325.37 461.56,269.43 R24.1 483.2,182.5 499.91,199.21 534.46,199.21 551.75,216.5 551.75,219.21 556.59,224.06 R23.2
PA02_A0_D0: J1.7 R14.1 U21.7 | length 293.1
  Bottom Layer w10: J1.7 R14.1 52.5,789.14 58.36,795 159.14,795 165,789.14 U21.7
PA4_A1_D1: J1.6
PA5_A9_D9_MISO: J2.5
PA6_A10_D10_MOIS: J2.4
PA7_A8_D8_SCK: J2.6 R1.2 | length 221.5
  Bottom Layer w10: R1.2 595,385.94 595,225.93 601.89,219.04 640.86,219.04 J2.6
PA9_A5_D5_SCL: J1.2
PA10_A2_D2: J1.5
PA11_A3_D3: J1.4
PAB_A4_D4_SDA: J1.3
PB08_A6_D6_TX: J1.1
PB09_A7_D7_RX: J2.7

## Polygon pours and split planes (outlines as drawn)
GND on Bottom Layer "GND_L02_P003" (solid, pour order 3): 72.5,825 625,825 cw(c625,750) 700,750 700,70 cw(c630,70) 630,0 72.5,0 cw(c72.5,72.5) 0,72.5 0,752.5 cw(c72.5,752.5)
GND on Top Layer "GND_L01_P002" (solid, pour order 2): 625,825 cw(c625,750) 700,750 700,70 cw(c630,70) 630,0 72.5,0 cw(c72.5,72.5) 0,72.5 0,752.5 cw(c72.5,752.5) 72.5,825

## Silkscreen, mask and mechanical layers (free items; w line width, h text height)
Top Overlay:
  drawing of 7 lines, arcs and shapes, not listed
  text "ETH  / Actitouch" at 262.5,277.5 h15
Mechanical 1:
  the board outline again, w10